# EAGLE board untitled (EAGLE 9.6.2)
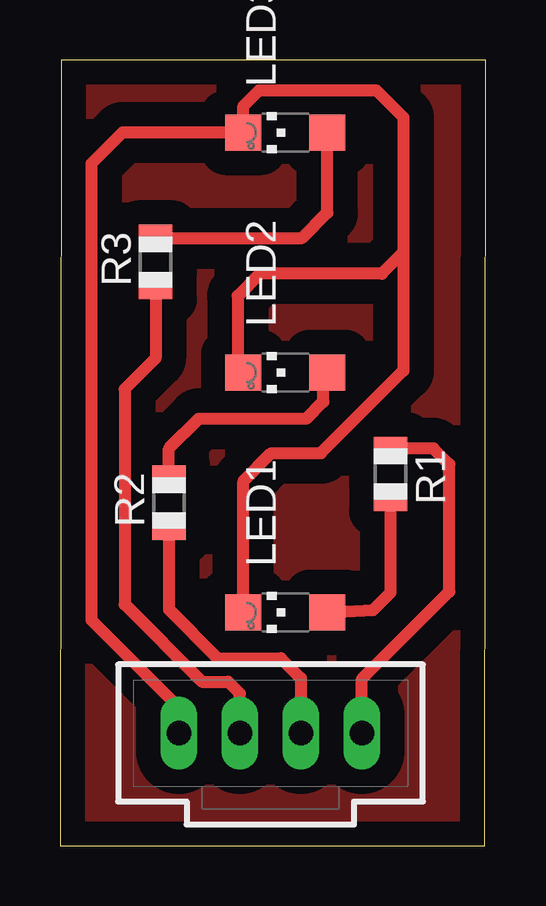
[diagram p0: board, top side]
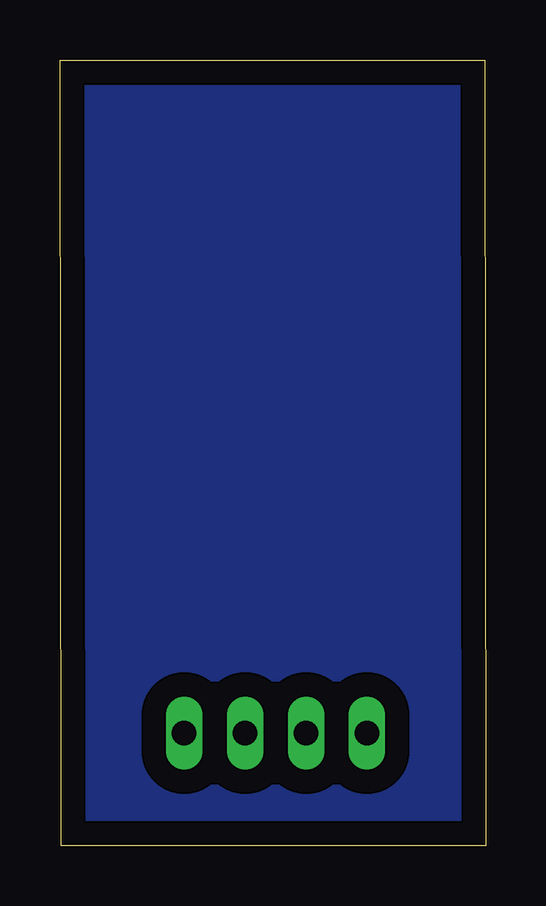
[diagram p1: board, bottom side, seen from below]

Size 17.75 x 32.76 mm. Coordinates in mm from the lower left corner, seen from the top.
Outline: 0,0 17.7,0 17.75,32.76 0.05,32.76 0,0
Copper layers (1*16): Top 0.035mm / dielectric 1.5mm / Bottom 0.035mm
Design rules "default": minimum track width 6mil, minimum drill 0.35mm, track to track 6mil, track to pad 6mil, pad to pad 6mil, via to via 6mil, smd to smd 6mil, copper to edge 40mil, drill to drill 6mil, minimum pad ring 10mil, minimum via ring 8mil, stop-mask expansion 4mil, vias tented up to drill 0mil, thermal gap 10mil

## Footprints (pad centres in the part's own frame; a part is rotated, then mirrored left to right if it is on the bottom)
CHIPLED_1206 = smd 1.5 x 1.5: A 0,-1.75; C 0,1.75
R0805 = smd 1.1 x 1.4: 1 -1,0; 2 1,0
70543-04 = drill 1.016 long: 1 -3.81,0; 2 -1.27,0; 3 1.27,0; 4 3.81,0

## Placement (x,y rotation side)
LED1  [CHIPLED_1206]  9.39,9.73 90 top
LED2  [CHIPLED_1206]  9.39,19.73 90 top
LED3  [CHIPLED_1206]  9.39,29.73 90 top
R1  [R0805]  13.77,15.5 270 top
R2  [R0805]  4.54,14.3 90 top
R3  [R0805]  3.98,24.34 90 top
X1  C-GRID-04-70543  [70543-04]  8.77,4.7 0 top

## Library data of the parts
LED1-LED3 R1-R3 = adafruit
X1 = con-molex; MF: MOLEX; OC_FARNELL: unknown; OC_NEWARK: unknown

## Nets
N$1: R1.1 X1.4
N$2: R2.1 X1.3
N$3: R3.1 X1.2
N$4: LED1.A R1.2
N$5: LED2.A R2.2
N$6: LED3.A R3.2
N$7: LED1.C LED2.C LED3.C X1.1

## Tracks (layer width: path | path; a pad name or v marks a point on that pad's centre or on a via)
N$1
  Top 0.508: R1.1 13.84,16.57 15.56,16.57 16.22,15.9 16.22,10.6 12.58,6.95 X1.4
N$2
  Top 0.508: R2.1 4.54,9.84 6.56,7.82 9.2,7.82 10.04,6.98 X1.3
N$3
  Top 0.508: R3.1 3.98,20.33 2.69,19.04 2.69,10.05 5.91,6.83 7.01,6.83 7.5,6.34 X1.2
N$4
  Top 0.508: LED1.A 13.05,9.83 13.78,10.56 R1.2
N$5
  Top 0.508: R2.2 4.54,16.56 5.78,17.8 10.26,17.8 10.97,18.51 10.97,19.78 LED2.A
N$6
  Top 0.508: R3.2 10.09,25.34 11.14,26.39 LED3.A
N$7
  Top 0.508: 14.31,24.74 14.31,30.36 13.19,31.49 8.29,31.49 7.64,30.84 LED3.C 2.6,29.73 1.31,28.44 1.31,9.41 4.96,5.77 X1.1 | 14.31,24.74 13.42,23.85 8.33,23.85 7.41,22.92 7.41,19.84 LED2.C | 14.31,24.74 14.31,19.81 10.87,16.37 8.81,16.37 7.64,15.2 LED1.C
N$8
  pour Bottom (isolate 1.016): 0.05,32.76 0.05,-0.03 17.75,-0.03 17.75,32.76
N$9
  pour Top (isolate 1.016): 0.05,32.76 0.05,-0.03 17.75,-0.03 17.75,32.76